# EAGLE board P48_128MIKAY (EAGLE 6.4)
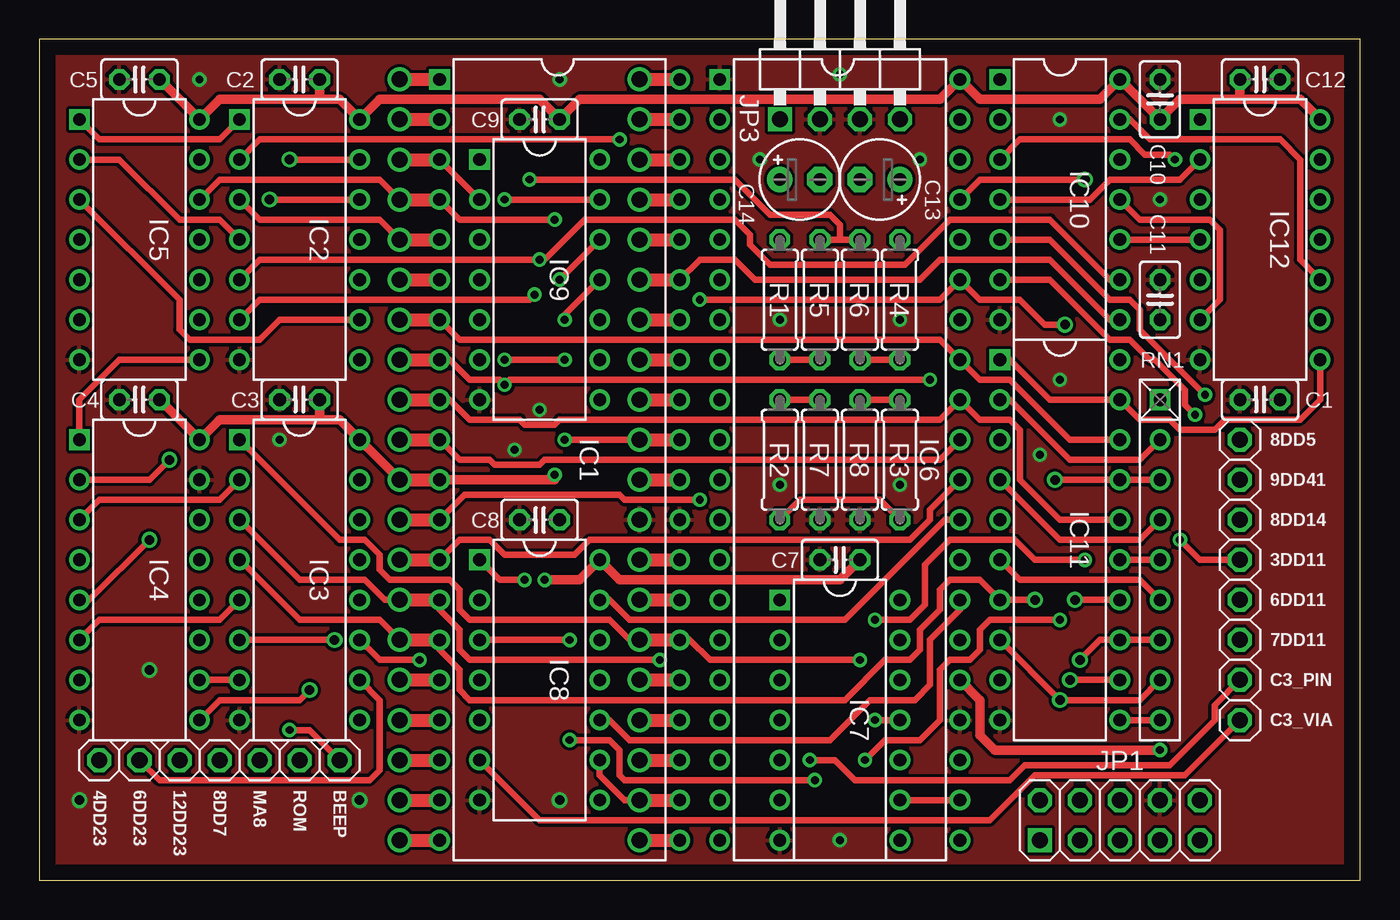
[diagram p0: board, top side]
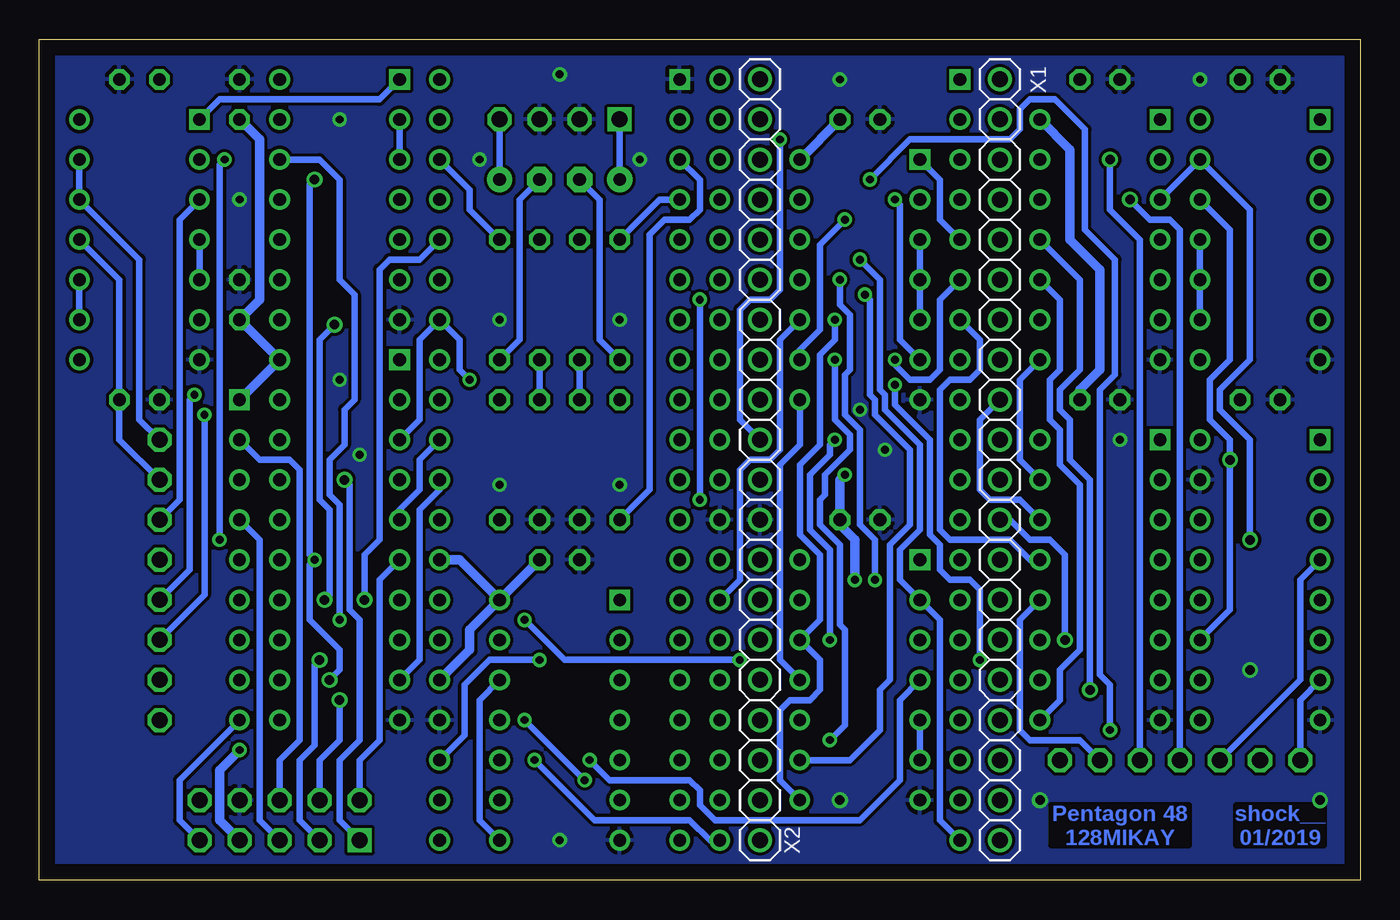
[diagram p1: board, bottom side, seen from below]

Size 83.82 x 53.34 mm. Coordinates in mm from the lower left corner, seen from the top.
Outline: 0,0 83.82,0 83.82,53.34 0,53.34 0,0
Copper layers (1*16): Top 0.035mm / dielectric 1.5mm / Bottom 0.035mm
Design rules "default *": minimum track width 0.18mm, minimum drill 0.5mm, track to track 8mil, track to pad 8mil, pad to pad 8mil, via to via 8mil, smd to smd 8mil, copper to edge 40mil, drill to drill 8mil, minimum pad ring 10mil, minimum via ring 8mil, stop-mask expansion 4mil, vias tented up to drill 0.6mm, thermal gap 10mil

## Footprints (pad centres in the part's own frame; a part is rotated, then mirrored left to right if it is on the bottom)
1X01 = drill 1.016 octagon: 1 0,0
C025-025X050 = drill 0.813 octagon: 1 -1.27,0; 2 1.27,0
E2,5-5 = drill 0.813 pad 1.6: + -1.27,0 | drill 0.813 pad 1.6 octagon: - 1.27,0
DIL40 = drill 0.813 square: 1 -24.13,-7.62 | drill 0.813: 2 -21.59,-7.62; 3 -19.05,-7.62; 4 -16.51,-7.62; 5 -13.97,-7.62; 6 -11.43,-7.62; 7 -8.89,-7.62; 8 -6.35,-7.62; 9 -3.81,-7.62; 10 -1.27,-7.62; 11 1.27,-7.62; 12 3.81,-7.62; 13 6.35,-7.62; 14 8.89,-7.62; 15 11.43,-7.62; 16 13.97,-7.62; 17 16.51,-7.62; 18 19.05,-7.62; 19 21.59,-7.62; 20 24.13,-7.62; 21 24.13,7.62; 22 21.59,7.62; 23 19.05,7.62; 24 16.51,7.62; 25 13.97,7.62; 26 11.43,7.62; 27 8.89,7.62; 28 6.35,7.62; 29 3.81,7.62; 30 1.27,7.62; 31 -1.27,7.62; 32 -3.81,7.62; 33 -6.35,7.62; 34 -8.89,7.62; 35 -11.43,7.62; 36 -13.97,7.62; 37 -16.51,7.62; 38 -19.05,7.62; 39 -21.59,7.62; 40 -24.13,7.62
DIL14 = drill 0.813 square: 1 -7.62,-3.81 | drill 0.813: 2 -5.08,-3.81; 3 -2.54,-3.81; 4 0,-3.81; 5 2.54,-3.81; 6 5.08,-3.81; 7 7.62,-3.81; 8 7.62,3.81; 9 5.08,3.81; 10 2.54,3.81; 11 0,3.81; 12 -2.54,3.81; 13 -5.08,3.81; 14 -7.62,3.81
DIL16 = drill 0.813 square: 1 -8.89,-3.81 | drill 0.813: 2 -6.35,-3.81; 3 -3.81,-3.81; 4 -1.27,-3.81; 5 1.27,-3.81; 6 3.81,-3.81; 7 6.35,-3.81; 8 8.89,-3.81; 9 8.89,3.81; 10 6.35,3.81; 11 3.81,3.81; 12 1.27,3.81; 13 -1.27,3.81; 14 -3.81,3.81; 15 -6.35,3.81; 16 -8.89,3.81
DIP-40 = drill 0.813 square: 1 -24.13,-7.62 | drill 0.813: 2 -21.59,-7.62; 3 -19.05,-7.62; 4 -16.51,-7.62; 5 -13.97,-7.62; 6 -11.43,-7.62; 7 -8.89,-7.62; 8 -6.35,-7.62; 9 -3.81,-7.62; 10 -1.27,-7.62; 11 1.27,-7.62; 12 3.81,-7.62; 13 6.35,-7.62; 14 8.89,-7.62; 15 11.43,-7.62; 16 13.97,-7.62; 17 16.51,-7.62; 18 19.05,-7.62; 19 21.59,-7.62; 20 24.13,-7.62; 21 24.13,7.62; 22 21.59,7.62; 23 19.05,7.62; 24 16.51,7.62; 25 13.97,7.62; 26 11.43,7.62; 27 8.89,7.62; 28 6.35,7.62; 29 3.81,7.62; 30 1.27,7.62; 31 -1.27,7.62; 32 -3.81,7.62; 33 -6.35,7.62; 34 -8.89,7.62; 35 -11.43,7.62; 36 -13.97,7.62; 37 -16.51,7.62; 38 -19.05,7.62; 39 -21.59,7.62; 40 -24.13,7.62
DIL20 = drill 0.813 square: 1 -11.43,-3.81 | drill 0.813: 2 -8.89,-3.81; 3 -6.35,-3.81; 4 -3.81,-3.81; 5 -1.27,-3.81; 6 1.27,-3.81; 7 3.81,-3.81; 8 6.35,-3.81; 9 8.89,-3.81; 10 11.43,-3.81; 11 11.43,3.81; 12 8.89,3.81; 13 6.35,3.81; 14 3.81,3.81; 15 1.27,3.81; 16 -1.27,3.81; 17 -3.81,3.81; 18 -6.35,3.81; 19 -8.89,3.81; 20 -11.43,3.81
2X05 = drill 1.016 square: 1 -5.08,-1.27 | drill 1.016 octagon: 2 -5.08,1.27; 3 -2.54,-1.27; 4 -2.54,1.27; 5 0,-1.27; 6 0,1.27; 7 2.54,-1.27; 8 2.54,1.27; 9 5.08,-1.27; 10 5.08,1.27
1X04/90 = drill 1.016 square: 1 -3.81,-3.81 | drill 1.016 octagon: 2 -1.27,-3.81; 3 1.27,-3.81; 4 3.81,-3.81
0207/7 = drill 0.813 octagon: 1 -3.81,0; 2 3.81,0
RN-9 = drill 0.813 square: 1 -10.16,0 | drill 0.813: 2 -7.62,0; 3 -5.08,0; 4 -2.54,0; 5 0,0; 6 2.54,0; 7 5.08,0; 8 7.62,0; 9 10.16,0
1X20 = drill 1.016: 1 -24.13,0; 2 -21.59,0; 3 -19.05,0; 4 -16.51,0; 5 -13.97,0; 6 -11.43,0; 7 -8.89,0; 8 -6.35,0; 9 -3.81,0; 10 -1.27,0; 11 1.27,0; 12 3.81,0; 13 6.35,0; 14 8.89,0; 15 11.43,0; 16 13.97,0; 17 16.51,0; 18 19.05,0; 19 21.59,0; 20 24.13,0

## Placement (x,y rotation side)
3DD11  [1X01]  76.2,20.32 0 top
4DD23  [1X01]  3.81,7.62 0 top
6DD11  [1X01]  76.2,17.78 0 top
6DD23  [1X01]  6.35,7.62 0 top
7DD11  [1X01]  76.2,15.24 0 top
8DD5  [1X01]  76.2,27.94 0 top
8DD7  [1X01]  11.43,7.62 0 top
8DD14  [1X01]  76.2,22.86 0 top
9DD41  [1X01]  76.2,25.4 0 top
12DD23  [1X01]  8.89,7.62 0 top
BEEP  [1X01]  19.05,7.62 0 top
C1  4.7nF  [C025-025X050]  77.47,30.48 180 top
C2  [C025-025X050]  16.51,50.8 180 top
C3  [C025-025X050]  16.51,30.48 180 top
C3_PIN  [1X01]  76.2,12.7 0 top
C3_VIA  [1X01]  76.2,10.16 0 top
C4  [C025-025X050]  6.35,30.48 180 top
C5  [C025-025X050]  6.35,50.8 180 top
C7  [C025-025X050]  50.8,20.32 180 top
C8  [C025-025X050]  31.75,22.86 180 top
C9  [C025-025X050]  31.75,48.26 180 top
C10  [C025-025X050]  71.12,49.53 90 top
C11  [C025-025X050]  71.12,36.83 90 top
C12  [C025-025X050]  77.47,50.8 0 top
C13  10uF  [E2,5-5]  53.34,44.45 180 top
C14  10uF  [E2,5-5]  48.26,44.45 0 top
IC1  Z80A  [DIL40]  33.02,26.67 270 top
IC2  74LS02/555LE1  [DIL14]  16.51,40.64 270 top
IC3  74LS174/555TM9  [DIL16]  16.51,19.05 270 top
IC4  74LS257/555KP11  [DIL16]  6.35,19.05 270 top
IC5  74LS00/555LA3  [DIL14]  6.35,40.64 270 top
IC6  YM2149F/AY-3-8912  [DIP-40]  50.8,26.67 270 top
IC7  74LS74/555TM2  [DIL14]  50.8,10.16 270 top
IC8  74LS02/555LE1  [DIL14]  31.75,12.7 270 top
IC9  74LS00/555LA3  [DIL14]  31.75,38.1 270 top
IC10  74LS02/555LE1  [DIL14]  64.77,43.18 270 top
IC11  74LS240/555AP3  [DIL20]  64.77,21.59 270 top
IC12  74LS00/555LA3  [DIL14]  77.47,40.64 270 top
JP1  [2X05]  68.58,3.81 0 top
JP3  [1X04/90]  50.8,52.07 0 top
MA8  [1X01]  13.97,7.62 0 top
R1  1K  [0207/7]  46.99,36.83 270 top
R2  2.2K  [0207/7]  46.99,26.67 90 top
R3  2.2K  [0207/7]  54.61,26.67 90 top
R4  1K  [0207/7]  54.61,36.83 270 top
R5  16K  [0207/7]  49.53,36.83 90 top
R6  15K  [0207/7]  52.07,36.83 90 top
R7  2.2K  [0207/7]  49.53,26.67 90 top
R8  2.2K  [0207/7]  52.07,26.67 90 top
RN1  8x8.2K  [RN-9]  71.12,20.32 270 top
ROM  [1X01]  16.51,7.62 0 top
X1  [1X20]  22.86,26.67 270 bottom
X2  [1X20]  38.1,26.67 90 bottom

## Library data of the parts
3DD11 4DD23 6DD11 6DD23 7DD11 8DD5 8DD7 8DD14 9DD41 12DD23 BEEP C3_PIN C3_VIA JP1 JP3 MA8 ROM X1 X2 = pinhead
C1-C5 C7-C14 R1-R8 = rcl
IC1 = zilog
IC2-IC5 IC7-IC12 = 74xx-eu
IC6 = own
RN1 = resistor-net; OC_FARNELL: unknown; OC_NEWARK: unknown

## Nets
4D23: 4DD23.1 IC4.7
6D23: 6DD23.1 IC3.10
8D7: 8DD7.1 IC2.12
12D23: 12DD23.1 IC4.4
!JOY_BUTTON1: IC11.2 JP1.6 RN1.2
!JOY_BUTTON2: IC11.11 JP1.9 RN1.9
!JOY_BUTTON3: IC11.4 JP1.5 RN1.4
!JOY_DOWN: IC11.6 JP1.2 RN1.6
!JOY_LEFT: IC11.13 JP1.3 RN1.7
!JOY_RIGHT: IC11.8 JP1.4 RN1.8
!JOY_UP: IC11.17 JP1.1 RN1.3
A0: IC1.30 X2.10
A1: IC1.31 IC2.2 IC8.3 X2.11
A2: IC1.32 X2.12
A3: IC1.33 X2.13
A4: IC1.34 X2.14
A5: IC1.35 IC10.8 X2.15
A6: IC1.36 X2.16
A7: IC1.37 X2.17
A8: IC1.38 X2.18
A9: IC1.39 X2.19
A10: IC1.40 X2.20
A11: IC1.1 X1.1
A12: IC1.2 X1.2
A13: IC1.3 IC9.2 X1.3
A14: IC1.4 IC4.2 IC4.11 IC5.12 IC9.9 X1.4
A15: IC1.5 IC2.3 IC4.5 IC5.13 IC9.1 X1.5
BEEP_MIX: BEEP.1 R5.2 R6.2
BUSAK: IC1.23 X2.3
BUSRQ: IC1.25 X2.5
CLK: IC1.6 IC7.11 X1.6
D0: IC1.14 IC3.3 IC6.37 IC11.12 X1.14
D1: IC1.15 IC3.4 IC6.36 IC11.7 X1.15
D2: IC1.12 IC3.6 IC6.35 IC11.14 X1.12
D3: IC1.8 IC3.11 IC6.34 IC11.3 X1.8
D4: IC1.7 IC3.13 IC6.33 IC11.18 X1.7
D5: IC1.9 IC3.14 IC6.32 IC11.16 X1.9
D6: IC1.10 IC6.31 IC11.5 X1.10
D7: IC1.13 IC6.30 IC11.9 X1.13
GND: C1.2 C2.2 C3.2 C4.2 C5.2 C7.2 C8.2 C9.2 C10.2 C11.2 C12.2 IC1.29 IC2.7 IC3.8 IC4.8 IC4.15 IC5.7 IC6.1 IC6.24 IC7.7 IC8.7 IC9.7 IC10.7 IC11.10 IC12.7 JP1.8 JP3.2 JP3.3 R7.1 R8.1 X2.9
HALT: IC1.18 X1.18
INT: IC1.16 X1.16
IORQ: IC1.20 IC2.5 IC8.2 IC10.9 X1.20
M1: IC1.27 IC9.10 X2.7
MA8: IC2.13 MA8.1
MREQ: IC1.19 X1.19
N$1: C3_VIA.1 IC8.5 IC8.6
N$2: IC5.9 IC5.10 IC5.11
N$3: IC11.1 IC11.19 IC12.8
N$4: C3_PIN.1 IC8.4
N$5: IC9.3 IC9.4 IC9.5
N$7: 8DD5.1 IC12.12 IC12.13
N$8: 9DD41.1 C1.1 IC12.11
N$9: IC11.15 RN1.5
N$10: C14.- R1.2 R2.2 R5.1 R7.2
N$11: C13.- R3.2 R4.2 R6.1 R8.2
N$12: 3DD11.1 IC10.2 IC10.3
N$13: IC9.6 IC9.13
N$14: IC8.1 IC9.12
N$15: IC8.11 IC9.8
N$16: IC6.29 IC8.13
N$17: IC8.8 IC8.12 IC9.11
N$18: IC10.1 IC12.1
N$19: IC2.10 IC3.9
N$20: IC10.4 IC12.2
N$21: 8DD14.1 IC12.3
N$22: 6DD11.1 IC10.5
N$23: 7DD11.1 IC10.6
N$25: IC7.8 IC7.12
N$26: IC2.1 IC5.1
N$28: IC2.4 IC5.2
N$29: IC6.22 IC7.9
N$30: IC6.27 IC8.10
N$31: IC2.9 IC5.3
N$32: IC2.8 IC3.15
N$33: IC10.10 IC12.4 IC12.5
N$34: IC10.11 IC12.6
N$35: IC4.1 IC5.8
N$36: IC3.7 IC4.10
N$37: IC3.5 IC4.6
N$38: IC3.2 IC4.3
N$40: IC10.13 IC12.9 IC12.10
N$42: IC2.11 IC4.9
NMI: IC1.17 X1.17
OUT_A: IC6.4 R1.1
OUT_B: IC6.3 R2.1 R3.1
OUT_C: IC6.38 R4.1
OUT_LEFT: C14.+ JP3.1
OUT_RIGHT: C13.+ JP3.4
RD: IC1.21 IC10.12 X2.1
RESET: IC1.26 IC3.1 IC6.23 X2.6
RFSH: IC1.28 X2.8
ROM: IC3.12 ROM.1
VCC: C2.1 C3.1 C4.1 C5.1 C7.1 C8.1 C9.1 C10.1 C11.1 C12.1 IC1.11 IC2.14 IC3.16 IC4.16 IC5.14 IC6.25 IC6.28 IC6.40 IC7.14 IC8.14 IC9.14 IC10.14 IC11.20 IC12.14 JP1.7 RN1.1 X1.11
WAIT: IC1.24 X2.4
WR: IC1.22 IC2.6 IC8.9 X2.2

## Tracks (layer width: path | path; a pad name or v marks a point on that pad's centre or on a via)
4D23
  Bottom 0.406: IC4.7 3.81,11.43 4DD23.1
6D23
  Top 0.406: IC3.10 21.59,11.43 21.59,6.99 20.95,6.35 7.62,6.35 6DD23.1
8D7  (via drill 0.6)
  Top 0.406: v14.61,43.18 IC2.12
  Bottom 0.406: 8DD7.1 11.43,41.27 12.06,41.91 13.34,41.91 v14.61,43.18
12D23
  Bottom 0.406: IC4.4 3.81,19.05 3.81,12.7 12DD23.1
!JOY_BUTTON1
  Top 0.406: RN1.2 69.85,26.67 65.41,26.67 61.59,30.48 IC11.2
  Bottom 0.406: RN1.2 69.85,26.67 67.94,26.67 67.31,26.04 67.31,8.89 68.58,7.62 JP1.6
!JOY_BUTTON2
  Top 0.406: IC11.11 RN1.9
  Bottom 0.406: RN1.9 74.93,6.35 74.93,3.81 JP1.9
!JOY_BUTTON3
  Top 0.406: RN1.4 69.85,21.59 64.77,21.59 IC11.4
  Bottom 0.406: RN1.4 69.85,21.59 69.85,3.81 JP1.5
!JOY_DOWN
  Top 0.406: RN1.6 69.85,19.05 62.23,19.05 IC11.6
  Bottom 0.406: IC11.6 62.23,19.05 62.23,8.89 63.5,7.62 JP1.2
!JOY_LEFT  (via drill 0.6)
  Top 0.406: RN1.7 IC11.13 67.31,15.24 v66.04,13.97
  Bottom 0.406: v66.04,13.97 66.36,13.65 66.36,8.57 67.31,7.62 67.31,3.81 JP1.3
!JOY_RIGHT  (via drill 0.6)
  Top 0.406: RN1.8 69.85,11.43 v64.77,11.43 IC11.8
  Bottom 0.406: v64.77,11.43 64.77,8.89 66.04,7.62 JP1.4
!JOY_UP  (via drill 0.6)
  Top 0.406: RN1.3 IC11.17 v64.45,25.4
  Bottom 0.406: v64.45,25.4 64.14,25.08 64.14,17.14 63.5,16.51 63.5,8.89 64.77,7.62 64.77,3.81 JP1.1
A0
  Top 0.813: X2.10 IC1.30
A1  (via drill 0.5)
  Top 0.406: IC2.2 13.97,46.99 v36.83,46.99 | IC8.3 v33.66,15.24 | v33.34,27.94 X2.11
  Top 0.813: X2.11 IC1.31
  Bottom 0.406: v36.83,46.99 36.83,37.47 37.47,36.83 38.73,36.83 39.37,36.2 39.37,29.21 X2.11 | v33.66,15.24 33.66,20.95 34.92,22.23 34.92,25.72 33.66,26.99 33.66,27.62 v33.34,27.94
A2
  Top 0.813: X2.12 IC1.32
A3
  Top 0.813: X2.13 IC1.33
A4
  Top 0.813: X2.14 IC1.34
A5
  Top 0.406: IC1.35 41.91,39.37 44.13,39.37 45.4,38.1 55.88,38.1 57.15,39.37 64.14,39.37 67.94,35.56 IC10.8
  Top 0.813: X2.15 IC1.35
A6
  Top 0.813: X2.16 IC1.36
A7
  Top 0.813: X2.17 IC1.37
A8
  Top 0.813: X2.18 IC1.38
A9
  Top 0.813: X2.19 IC1.39
A10
  Top 0.813: X2.20 IC1.40
A11
  Top 0.813: X1.1 IC1.1
A12
  Top 0.813: X1.2 IC1.2
A13
  Top 0.406: IC1.3 IC9.2
  Top 0.813: X1.3 IC1.3
A14  (via drill 0.5, 0.6)
  Top 0.406: IC5.12 11.43,44.45 21.59,44.45 X1.4 | v8.26,26.67 6.99,25.4 IC4.2 | IC1.4 26.67,41.91 v32.7,41.91
  Top 0.813: X1.4 IC1.4
  Bottom 0.406: IC5.12 8.26,41.27 8.26,33.02 9.53,31.75 9.53,29.21 8.26,27.94 v8.26,26.67 8.26,17.14 IC4.11 | v32.7,41.91 34.29,40.32 34.29,34.92 35.56,33.66 IC9.9
A15  (via drill 0.6)
  Top 0.406: IC2.3 13.97,41.91 21.59,41.91 X1.5 | IC4.5 3.17,17.78 v6.99,21.59
  Top 0.813: X1.5 IC1.5
  Bottom 0.406: IC2.3 IC5.13 6.99,42.55 6.99,33.02 8.89,31.11 8.89,29.84 6.99,27.94 v6.99,21.59 | IC1.5 26.67,41.91 26.67,44.45 IC9.1
BEEP_MIX  (via drill 0.5)
  Top 0.406: R5.2 50.8,40.64 | 50.8,40.64 R6.2 | BEEP.1 17.14,9.53 v15.88,9.53 | v31.11,44.45 44.13,44.45 46.35,42.23 50.16,42.23 50.8,41.59 50.8,40.64
  Bottom 0.406: v15.88,9.53 15.88,12.38 16.51,13.02 16.51,31.11 15.56,32.07 15.56,39.37 17.46,41.27 17.46,47.62 19.37,49.53 20.95,49.53 21.59,48.9 21.59,47.62 22.23,46.99 28.57,46.99 v31.11,44.45
BUSAK
  Top 0.813: X2.3 IC1.23
BUSRQ
  Top 0.813: X2.5 IC1.25
CLK  (via drill 0.5)
  Top 0.406: v29.53,33.02 v33.34,33.02 | IC7.11 v53.02,10.16 | v49.21,6.35 37.15,6.35 36.83,6.67 36.83,8.26 36.2,8.89 v33.66,8.89
  Top 0.813: X1.6 IC1.6
  Bottom 0.406: IC1.6 26.67,36.83 26.67,32.38 27.3,31.75 28.57,31.75 29.53,32.7 v29.53,33.02 | v33.34,33.02 33.34,29.21 32.38,28.26 32.38,27.3 33.97,25.72 33.97,24.45 34.29,24.13 34.29,22.54 33.02,21.27 33.02,16.19 32.7,15.88 32.7,9.84 v33.66,8.89 | v53.02,10.16 v49.21,6.35
D0  (via drill 0.5, 0.6)
  Top 0.406: 22.54,17.78 X1.14 21.91,17.78 20.64,19.05 16.51,19.05 IC3.3 | IC11.12 v65.41,12.7 | v66.36,44.45 59.69,44.45 IC6.37 | IC1.14 25.4,17.14 26.67,15.88 26.67,14.61 27.3,13.97 v39.37,13.97 | v66.36,20.32 63.18,20.32 61.91,21.59 57.78,21.59 56.2,20 56.2,17.46 55.24,16.51 v53.02,16.51
  Top 0.813: X1.14 IC1.14
  Bottom 0.406: v65.41,12.7 64.77,13.34 64.77,14.61 66.67,16.51 66.67,20 v66.36,20.32 66.67,20.64 66.67,44.13 v66.36,44.45 | v53.02,16.51 50.48,13.97 v39.37,13.97
D1  (via drill 0.6)
  Top 0.406: IC3.4 16.51,16.51 21.59,16.51 X1.15 | v63.18,17.78 IC11.7 59.69,19.05 57.78,19.05 57.15,18.41 57.15,17.14 55.88,15.88 55.88,14.61 55.24,13.97 53.66,13.97 51.12,11.43 27.3,11.43 26.67,12.06 26.67,13.34 25.4,14.61 IC1.15
  Top 0.813: X1.15 IC1.15
  Bottom 0.406: IC6.36 59.69,39.37 61.59,39.37 62.23,38.73 62.23,21.59 63.18,20.64 v63.18,17.78
D2  (via drill 0.5, 0.6)
  Top 0.406: v18.73,15.24 IC3.6 | IC11.14 v65.72,17.78 | v65.09,35.24 63.82,35.24 62.23,36.83 59.69,36.83 IC6.35 57.15,36.83 v41.91,36.83 | IC1.12 26.99,24.45 36.83,24.45 37.15,24.13 v41.91,24.13
  Top 0.813: X1.12 IC1.12
  Bottom 0.406: v18.73,15.24 18.73,20.64 19.68,21.59 20.95,21.59 22.23,22.86 X1.12 | v65.09,35.24 66.04,34.29 66.04,24.13 65.41,23.5 65.41,18.1 v65.72,17.78 | v41.91,24.13 v41.91,36.83
D3  (via drill 0.5)
  Top 0.406: v56.52,31.75 29.84,31.75 v29.53,31.43 29.21,31.75 27.3,31.75 26.04,33.02 IC1.8 | IC3.11 21.59,13.97 v24.13,13.97
  Top 0.813: X1.8 IC1.8
  Bottom 0.406: IC11.3 59.69,29.21 59.69,34.29 IC6.34 57.15,34.29 57.15,32.38 v56.52,31.75 | v24.13,13.97 24.13,18.41 24.77,19.05 26.04,19.05 26.67,19.68 26.67,21.27 27.3,21.91 27.3,27.94 29.53,30.16 v29.53,31.43
D4
  Top 0.406: IC11.18 65.41,27.94 61.59,31.75 59.69,31.75 IC6.33 57.15,34.29 26.67,34.29 IC1.7
  Top 0.813: X1.7 IC1.7
  Bottom 0.406: IC1.7 24.13,34.29 24.13,32.38 24.77,31.75 26.04,31.75 26.67,31.11 26.67,22.23 26.04,21.59 22.23,21.59 20.95,20.32 IC3.13
D5
  Top 0.406: IC11.16 64.77,22.86 62.23,25.4 62.23,28.57 61.59,29.21 59.69,29.21 IC6.32 57.15,29.21 33.02,29.21 32.7,28.89 30.8,28.89 30.48,29.21 27.3,29.21 26.04,30.48 IC1.9
  Top 0.813: X1.9 IC1.9
  Bottom 0.406: IC3.14 21.59,24.13 23.5,24.13 24.13,24.77 24.13,29.21 X1.9
D6
  Top 0.406: IC1.10 26.67,26.67 28.57,26.67 28.89,26.35 31.75,26.35 32.07,26.67 57.15,26.67 IC6.31
  Top 0.813: X1.10 IC1.10
  Bottom 0.406: IC6.31 59.69,26.67 59.69,24.77 60.96,23.5 IC11.5
D7
  Top 0.406: IC1.13 26.67,21.59 28.57,21.59 29.53,20.64 33.97,20.64 34.92,21.59 55.24,21.59 56.52,22.86 56.52,23.5 IC6.30
  Top 0.813: X1.13 IC1.13
  Bottom 0.406: IC11.9 59.69,13.97 59.69,23.5 58.42,24.77 IC6.30
GND  (via drill 0.5, 0.6)
  other vias: 6.99,13.34 33.02,5.08 2.54,5.08 20.32,5.08 30.16,27.3 15.24,27.94 31.75,29.84 54.61,25.08 46.99,25.08 46.99,35.56 54.61,35.56 50.8,2.54 64.77,48.26 64.77,31.75 63.5,26.99 55.88,45.72 45.72,45.72 50.8,51.12 33.02,50.8 10.16,50.8 71.12,43.18
  pour Top: 0,53.34 83.82,53.34 83.82,0 0,0
  pour Bottom: 0,53.34 83.82,53.34 83.82,0 0,0
HALT
  Top 0.813: X1.18 IC1.18
INT
  Top 0.813: X1.16 IC1.16
IORQ  (via drill 0.5)
  Top 0.406: IC2.5 13.97,39.37 v31.75,39.37 32.07,39.37 34.61,41.91 44.13,41.91 45.09,40.96 45.09,40.32 46.35,39.05 54.93,39.05 57.78,41.91 64.14,41.91 67.94,38.1 IC10.9
  Top 0.813: X1.20 IC1.20
  Bottom 0.406: v31.75,39.37 30.48,38.1 30.48,31.11 30.16,30.8 30.16,29.84 27.94,27.62 27.94,22.23 29.21,20.95 29.21,19.05 IC8.2 26.67,16.51 26.67,3.81 IC1.20
M1
  Top 0.813: X2.7 IC1.27
  Bottom 0.406: IC1.27 39.37,19.05 39.37,26.04 38.73,26.67 37.47,26.67 36.83,27.3 36.83,34.29 IC9.10
MA8  (via drill 0.6)
  Top 0.406: IC2.13 v15.88,45.72
  Bottom 0.406: v15.88,45.72 15.88,42.55 13.97,40.64 MA8.1
MREQ
  Top 0.813: X1.19 IC1.19
N$1
  Top 0.406: IC8.6 31.75,3.81 60.33,3.81 63.18,6.67 72.71,6.67 C3_VIA.1
  Bottom 0.406: IC8.5 IC8.6
N$2
  Bottom 0.406: IC5.11 IC5.10 IC5.9
N$3
  Top 0.406: IC11.1 61.59,33.02 64.14,30.48 IC11.19 69.85,29.21 71.75,29.21 72.39,28.57 74.61,28.57 75.25,29.21 80.01,29.21 81.28,30.48 IC12.8
N$4  (via drill 0.5)
  Top 0.406: v48.9,7.62 50.48,7.62 51.75,6.35 61.59,6.35 62.55,7.3 71.75,7.3 74.61,10.16 74.61,11.11 C3_PIN.1
  Bottom 0.406: IC8.4 29.21,11.43 29.21,6.35 31.75,3.81 40.96,3.81 41.91,4.76 41.91,5.71 42.55,6.35 47.62,6.35 v48.9,7.62
N$5
  Bottom 0.406: IC9.3 IC9.4 IC9.5
N$7
  Bottom 0.406: IC12.13 IC12.12 77.47,39.37 77.47,29.21 8DD5.1
N$8
  Bottom 0.406: IC12.11 78.74,38.1 C1.1 78.74,27.94 9DD41.1
N$9
  Top 0.406: IC11.15 RN1.5
N$10
  Top 0.406: R1.2 R5.1 | R7.2 R2.2
  Bottom 0.406: R5.1 R7.2 | R1.2 48.26,34.29 48.26,43.18 C14.-
N$11
  Top 0.406: R6.1 R4.2 | R3.2 R8.2
  Bottom 0.406: R8.2 R6.1 | C13.- 53.34,43.18 53.34,34.29 R4.2
N$12  (via drill 0.5)
  Top 0.406: IC10.3 62.23,46.99 69.22,46.99 70.17,46.04 71.75,46.04 v72.07,45.72 | 3DD11.1 73.66,20.32 v72.39,21.59
  Bottom 0.406: IC10.2 IC10.3 | v72.07,45.72 72.39,45.4 v72.39,21.59
N$13  (via drill 0.5)
  Top 0.406: IC9.13 v29.53,43.18
  Bottom 0.406: v29.53,43.18 29.21,42.86 29.21,34.29 IC9.6
N$14  (via drill 0.5)
  Top 0.406: v33.02,38.1 IC9.12 | IC8.1 29.21,19.05 v30.8,19.05
  Bottom 0.406: v33.02,38.1 33.02,36.51 32.38,35.88 32.38,32.38 32.7,32.07 32.7,29.53 31.75,28.57 31.75,22.54 30.8,21.59 v30.8,19.05
N$15
  Bottom 0.406: IC8.11 36.83,13.97 36.83,26.35 35.56,27.62 IC9.8
N$16
  Top 0.406: IC8.13 36.2,17.78 37.47,16.51 51.12,16.51 57.47,22.86 IC6.29
N$17  (via drill 0.5)
  Top 0.406: IC9.11 33.34,35.88 v33.34,35.56
  Bottom 0.406: IC8.8 36.83,6.35 36.83,10.79 36.2,11.43 34.92,11.43 34.29,12.06 34.29,13.97 IC8.12 34.29,16.51 34.29,20.64 35.56,21.91 35.56,26.35 34.29,27.62 34.29,33.34 33.34,34.29 v33.34,35.56
N$18
  Bottom 0.406: IC10.1 62.23,49.53 72.39,49.53 IC12.1
N$19
  Bottom 0.406: IC2.10 19.05,36.83 19.05,32.38 19.68,31.75 19.68,29.21 19.05,28.57 19.05,26.35 17.78,25.08 17.78,14.61 19.05,13.34 19.05,11.43 IC3.9
N$20
  Top 0.406: IC10.4 66.67,43.18 67.94,44.45 72.39,44.45 IC12.2
N$21
  Bottom 0.406: 8DD14.1 74.93,24.13 74.93,41.91 IC12.3
N$22  (via drill 0.5)
  Top 0.406: IC10.5 64.14,40.64 67.94,36.83 69.22,36.83 69.85,36.2 69.85,34.92 v73.98,30.8
  Bottom 0.406: v73.98,30.8 74.3,30.48 74.3,19.68 6DD11.1
N$23  (via drill 0.5)
  Top 0.406: IC10.6 64.14,38.1 67.94,34.29 69.22,34.29 70.48,33.02 70.8,33.02 72.71,31.11 72.71,30.16 v73.34,29.53
  Bottom 0.406: v73.34,29.53 73.34,18.1 7DD11.1
N$25
  Bottom 0.406: IC7.8 55.88,3.81 55.88,11.43 IC7.12
N$26
  Top 0.406: IC5.1 3.81,46.99 11.43,46.99 IC2.1
N$28
  Top 0.406: IC2.4 11.43,41.91 8.89,41.91 5.08,45.72 IC5.2
N$29
  Top 0.406: IC7.9 IC6.22
N$30
  Top 0.406: IC6.27 58.42,17.14 56.52,15.24 56.52,12.38 55.56,11.43 52.7,11.43 50.16,8.89 37.47,8.89 36.2,10.16 IC8.10
N$31
  Top 0.406: IC5.3 8.89,36.83 8.89,34.92 9.53,34.29 13.97,34.29 15.24,35.56 IC2.9
N$32
  Bottom 0.406: IC2.8 21.59,31.75 21.59,26.67 IC3.15
N$33
  Top 0.406: IC10.10 IC12.4
  Bottom 0.406: IC12.5 IC12.4
N$34
  Top 0.406: IC10.11 69.85,41.91 74.3,41.91 74.93,41.27 74.93,36.83 IC12.6
N$35
  Top 0.406: IC4.1 2.54,30.48 5.08,33.02 IC5.8
N$36
  Top 0.406: IC4.10 IC3.7
N$37
  Top 0.406: IC4.6 3.81,16.51 11.43,16.51 IC3.5
N$38
  Top 0.406: IC4.3 3.81,24.13 11.43,24.13 IC3.2
N$40
  Top 0.406: IC12.10 80.01,39.37 80.01,45.72 78.74,46.99 70.48,46.99 69.22,48.26 IC10.13
  Bottom 0.406: IC12.9 IC12.10
N$42  (via drill 0.6)
  Top 0.406: v17.14,12.06 16.51,11.43 11.43,11.43 IC4.9
  Bottom 0.406: IC2.11 17.78,38.1 17.78,32.38 19.05,31.11 19.05,29.84 18.41,29.21 18.41,26.67 17.14,25.4 v17.14,12.06
NMI
  Top 0.813: X1.17 IC1.17
OUT_A
  Bottom 0.406: IC6.4 44.45,43.18 R1.1
OUT_B
  Top 0.406: R2.1 48.26,24.13 53.34,24.13 R3.1
  Bottom 0.406: IC6.3 41.91,44.45 41.91,42.55 42.55,41.91 44.13,41.91 45.09,40.96 45.09,24.77 R2.1
OUT_C
  Bottom 0.406: IC6.38 56.52,43.81 56.52,42.55 R4.1
OUT_LEFT
  Bottom 0.406: C14.+ JP3.1
OUT_RIGHT
  Bottom 0.406: C13.+ JP3.4
RD  (via drill 0.5)
  Top 0.406: v64.77,16.51 60.33,16.51 59.69,15.88 59.69,14.61 59.05,13.97 57.78,13.97 57.15,13.34 57.15,10.16 55.88,8.89 53.66,8.89 v52.39,7.62
  Top 0.813: X2.1 IC1.21
  Bottom 0.406: v52.39,7.62 48.58,3.81 42.55,3.81 41.27,2.54 IC1.21 | v64.77,16.51 64.77,23.81 65.41,24.45 65.41,26.67 64.45,27.62 64.45,29.84 63.82,30.48 63.82,37.15 64.77,38.1 64.77,44.45 66.04,45.72 IC10.12
RESET  (via drill 0.5)
  Top 0.406: IC3.1 19.05,21.59 20.64,21.59 21.59,20.64 21.59,19.68 22.23,19.05 26.04,19.05 26.67,18.41 26.67,17.14 27.3,16.51 36.2,16.51 37.47,15.24 X2.6 | v52.07,13.97 42.55,13.97 41.27,15.24 IC1.26
  Top 0.813: X2.6 IC1.26
  Bottom 0.406: IC6.23 56.83,9.21 56.83,12.38 55.24,13.97 v52.07,13.97
RFSH
  Top 0.813: X2.8 IC1.28
ROM
  Bottom 0.406: IC3.12 21.59,16.51 21.59,9.53 20.95,8.89 17.78,8.89 ROM.1
VCC  (via drill 0.5)
  Top 0.61: 17.78,49.53 11.43,49.53 IC5.14 C5.1 | 17.78,49.53 19.05,49.53 IC2.14 21.59,49.53 31.75,49.53 C9.1 34.29,49.53 57.15,49.53 IC6.40 59.69,49.53 67.31,49.53 IC10.14 C10.1 72.39,49.53 76.2,49.53 | C2.1 17.78,49.53 | 17.78,29.21 19.05,29.21 IC3.16 X1.11 | 17.78,29.21 11.43,29.21 IC4.16 C4.1 | C3.1 17.78,29.21 | IC6.25 59.69,11.43 59.69,9.21 60.64,8.26 v71.12,8.26 | C7.1 50.8,19.05 36.83,19.05 IC8.14 34.29,19.05 v32.07,19.05 | IC1.11 32.7,25.4 v32.7,25.72 | 76.2,49.53 80.01,49.53 IC12.14 | C12.1 76.2,49.53
  Top 0.813: X1.11 IC1.11
  Bottom 0.61: C3.1 17.78,31.11 16.51,32.38 16.51,38.73 18.41,40.64 18.41,46.35 IC2.14 | RN1.1 IC11.20 C11.1 69.85,36.83 69.85,46.99 C10.1 | C7.1 IC7.14 | IC7.14 56.52,15.88 56.52,14.61 IC6.25 | C9.1 IC9.14 | IC7.14 57.15,20.32 IC6.28 | v32.7,25.72 33.02,25.4 C8.1 33.02,22.54 32.07,21.59 v32.07,19.05 | v71.12,8.26 72.39,6.99 72.39,3.81 JP1.7
WAIT
  Top 0.813: X2.4 IC1.24
WR  (via drill 0.5)
  Top 0.406: IC2.6 13.97,36.83 31.11,36.83 v31.43,37.15 | IC8.9 35.56,6.67 37.15,5.08 X2.2
  Top 0.813: X2.2 IC1.22
  Bottom 0.406: v31.43,37.15 31.11,36.83 31.11,30.8 30.8,30.48 30.8,29.53 28.57,27.3 28.57,22.54 29.84,21.27 29.84,12.7 30.48,12.06 30.48,9.53 32.38,7.62 IC8.9

## Text on the board
Bottom: shock__ / 01/2019 | Pentagon 48 / 128MIKAY
bStop: shock__ / 01/2019 | Pentagon 48 / 128MIKAY